# Altium PCB dwatch.PcbDoc
Units mm, origin at the board's own origin, x right, y up, seen from the top; angles counter-clockwise.
Board outline 152.4 x 101.6 mm, 2 copper layers (Top Layer, Bottom Layer); 64 components, 42 nets, 249 pads, 69 vias.
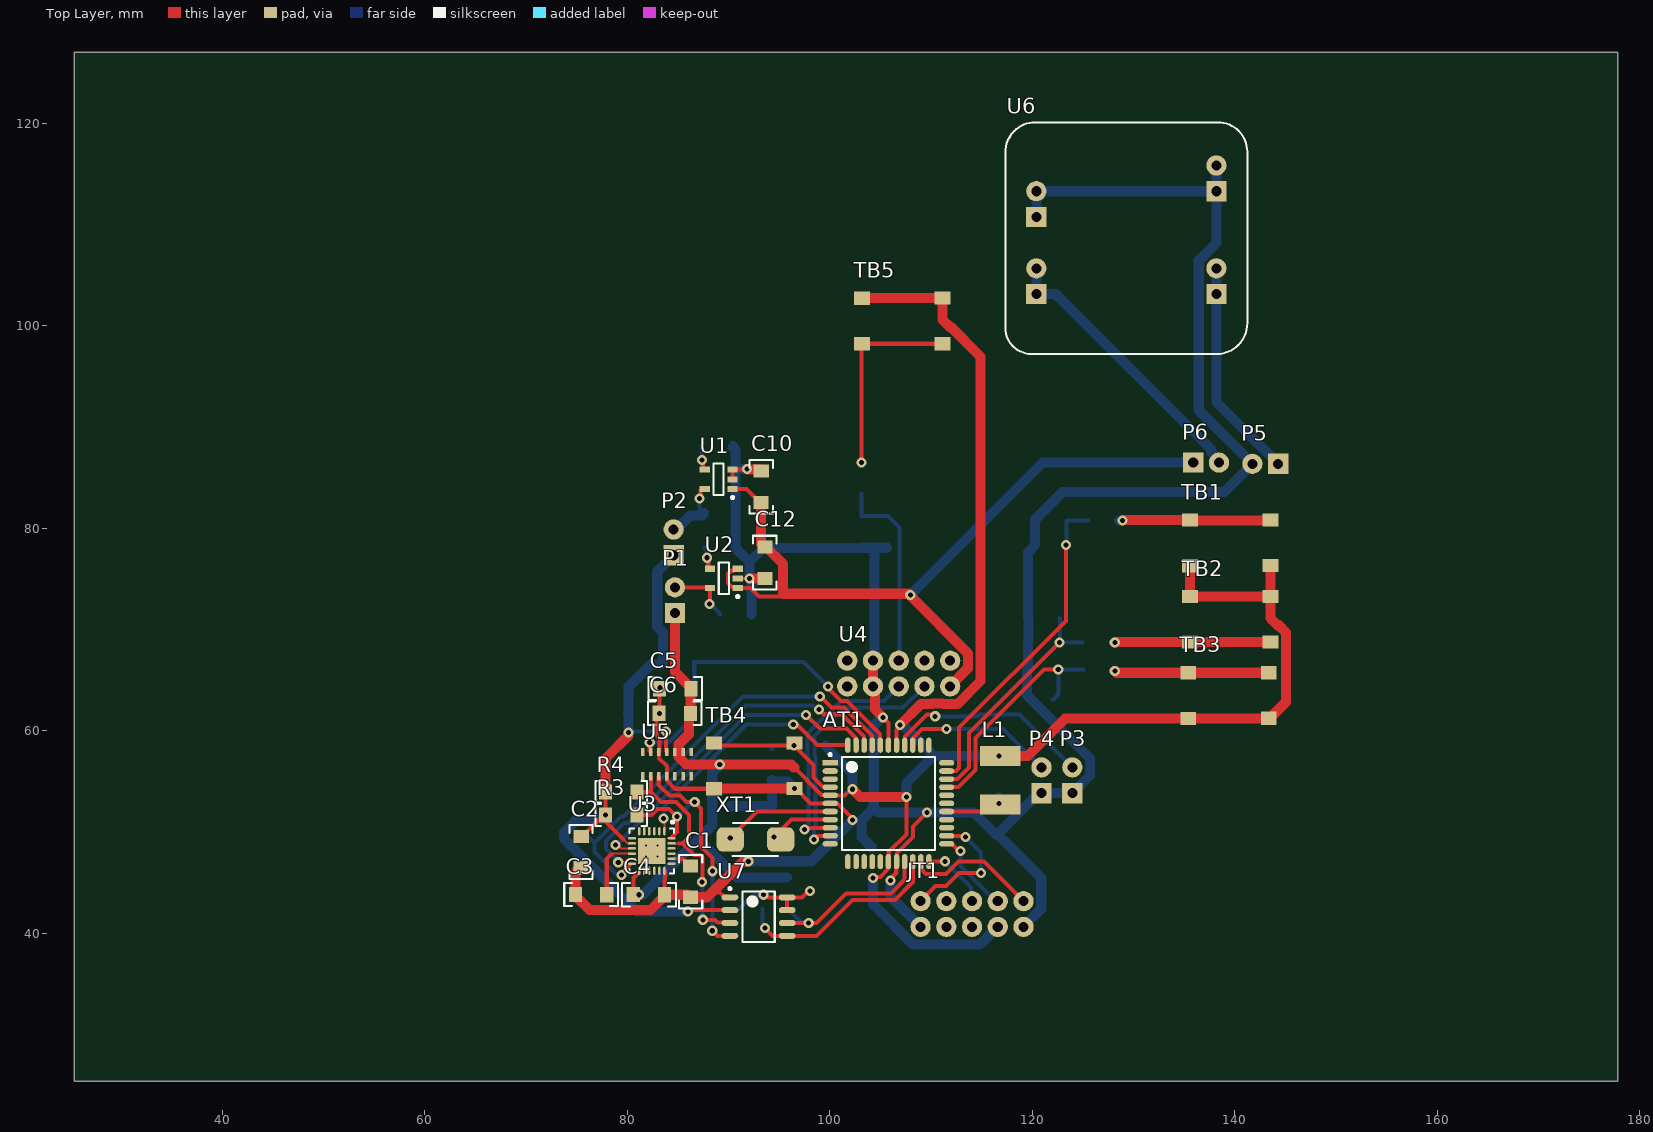
[diagram p0: Top Layer view]
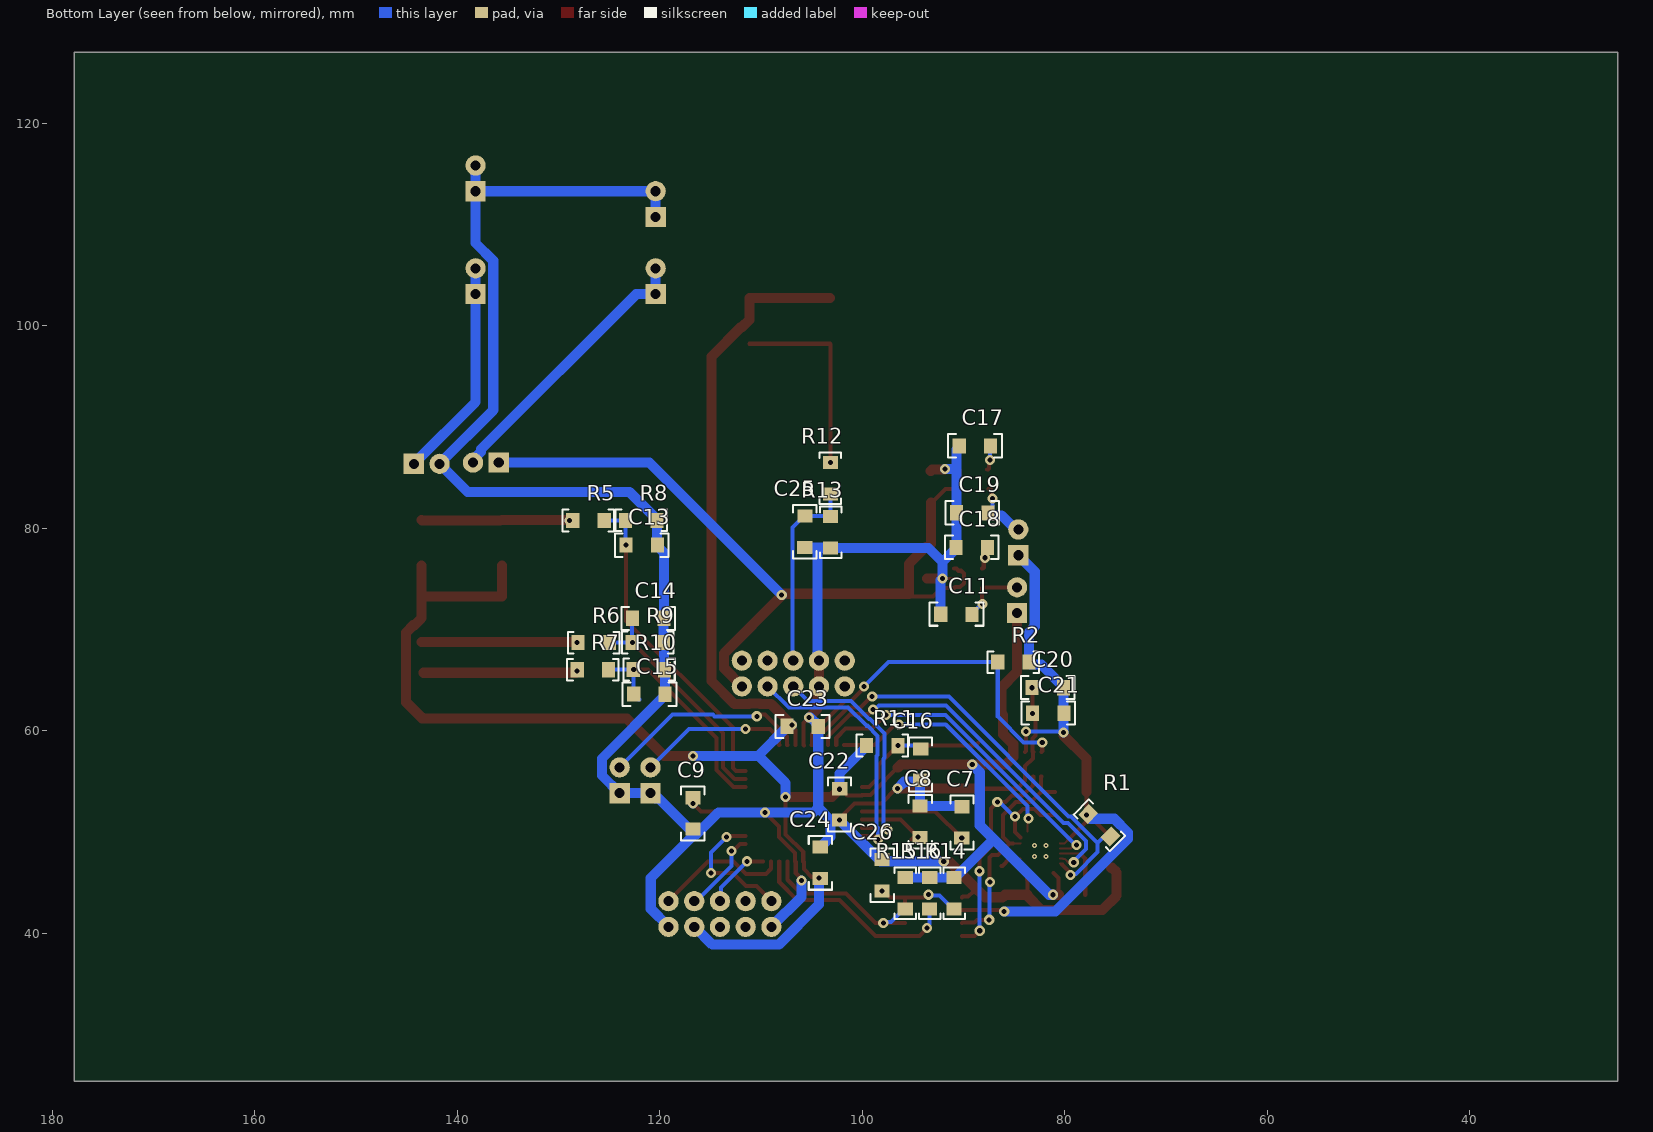
[diagram p1: Bottom Layer view, seen from below]

## Layer stack, top to bottom
Top Solder: solder mask 0.0102, Solder Resist, Dk 3.5
Top Layer: signal copper 0.0356
Dielectric 1: dielectric 0.32, FR-4, Dk 4.8
Bottom Layer: signal copper 0.0356
Bottom Solder: solder mask 0.0102, Solder Resist, Dk 3.5

## Board outline
25.4,25.4 177.8,25.4 177.8,127 25.4,127

## Design rules (kind name [scope] priority, off if disabled: settings)
Clearance Clearance_1 [All] p1: gap=0.25 ignorepadtopadclearanceinfootprint=FALSE except(0.2: SMDPad-SMDPad)
Clearance [All] p2: gap=0.25 ignorepadtopadclearanceinfootprint=FALSE
PolygonConnect [All] p1: connectstyle=Relief reliefconductorwidth=0.254 reliefentries=4 polygonreliefangle="90 Angle" airgapwidth=0.254
RoutingVias [All] p1: holewidth=0.5 width=1 viastyle="Through Hole" minholewidth=0.5 minwidth=1 maxholewidth=0.5 maxwidth=1
SolderMaskExpansion [All] p1: expansion=0.102 istentingtop=FALSE
Width [All] p1: maxlimit=1 minlimit=0.2 preferedwidth=0.4
30 further rules are at their usual default settings.

## Classes and differential pairs
component class dwatch: C1 C2 C3 C4 C5 C6 C7 C8 C9 C10 C11 C12 C13 C14 C15 C16 C17 C18 C19 C20 C21 C22 C23 C24 C25 C26 JT1 L1 P1 P2 P3 P4 P5 P6 R1 R2 R3 R4 R5 R6 R7 R8 R9 R10 R11 R12 R13 R14 R15 R16 TB1 TB2 TB3 TB4 TB5 U2 U4 U5 U6 XT1

## Components (designator, comment, footprint, x,y, rotation, side; value= is the part's Value field where it differs from the comment)
AT1 "ATmega644PA" TQFP-44 105.791,52.832 r0 top
C1 "1206, capacitor" "1206, capasitor" 86.207,42.986 r270 top value=2.2n
C2 "1206, capacitor" "1206, capasitor" 75.476,50.155 r90 top value=10n
C3 "1206, capacitor" "1206, capasitor" 78.553,43.789 r0 top value=0.1u
C4 "1206, capacitor" "1206, capasitor" 80.02,43.853 r180 top value=0.1u
C5 "1206, capacitor" "1206, capasitor" 86.858,64.12 r0 top value=10u
C6 "1206, capacitor" "1206, capasitor" 86.808,61.696 r0 top value=0.1u
C7 "1206, capacitor" "1206, capasitor" 90.196,48.828 r270 bottom value=10p
C8 "1206, capacitor" "1206, capasitor" 94.324,48.891 r270 bottom value=10p
C9 "1206, capacitor" "1206, capasitor" 116.675,53.965 r90 bottom value=100n
C10 "1206, capacitor" "1206, capasitor" 93.192,81.975 r270 top value=0.1u
C11 "1206, capacitor" "1206, capasitor" 88.579,71.475 r180 bottom value=10u
C12 "1206, capacitor" "1206, capasitor" 93.637,78.73 r90 top value=0.1u
C13 "1206, capacitor" "1206, capasitor" 123.892,78.385 r0 bottom value=1u
C14 "1206, capacitor" "1206, capasitor" 123.257,71.146 r0 bottom value=1u
C15 "1206, capacitor" "1206, capasitor" 123.13,63.653 r0 bottom value=1u
C16 "1206, capacitor" "1206, capasitor" 94.196,58.791 r90 bottom value=100n
C17 "1206, capacitor" "1206, capasitor" 86.751,88.1 r180 bottom value=0.1u
C18 "1206, capacitor" "1206, capasitor" 87.055,78.079 r180 bottom value=0.01u
C19 "1206, capacitor" "1206, capasitor" 87.005,81.496 r180 bottom value=1u
C20 "1206, capacitor" "1206, capasitor" 79.562,64.236 r180 bottom value=4.7u
C21 "1206, capacitor" "1206, capasitor" 79.512,61.707 r180 bottom value=0.1u
C22 "1206, capacitor" "1206, capasitor" 102.197,54.854 r90 bottom value=100n
C23 "1206, capacitor" "1206, capasitor" 108.017,60.478 r0 bottom value=100n
C24 "1206, capacitor" "1206, capasitor" 104.178,44.841 r270 bottom value=100n
C25 "1206, capacitor" "1206, capasitor" 105.626,81.778 r90 bottom value=1u
C26 "1206, capacitor" "1206, capasitor" 98.07,43.621 r270 bottom value=0.1u
JT1 "JTAG Connector" Atmel_JTAG 119.154,43.17 r180 top
L1 "Coil" "1812, coil" 116.84,55.118 r270 top value=10u
P1 "1x2 Pin Header" 1x2HEADER 84.709,71.628 r180 top
P2 "1x2 Pin Header" 1x2HEADER 84.582,77.343 r180 top
P3 "1x2 Pin Header" 1x2HEADER 123.952,53.848 r180 top
P4 "1x2 Pin Header" 1x2HEADER 120.904,53.848 r180 top
P5 "1x2 Pin Header" 1x2HEADER 144.272,86.36 r270 top
P6 "1x2 Pin Header" 1x2HEADER 135.89,86.487 r90 top
R1 "1206, resistor" 1206 75.287,49.387 r225 bottom value=1k
R2 "1206, resistor" 1206 86.9,66.788 r0 bottom value=1k
R3 "1206, resistor" 1206 81.235,51.692 r0 top value=1k
R4 "1206, resistor" 1206 81.235,53.978 r0 top value=1k
R5 "1206, resistor" 1206 128.86,80.769 r0 bottom value=1k
R6 "1206, resistor" 1206 128.352,68.704 r0 bottom value=1k
R7 "1206, resistor" 1206 128.429,66.026 r0 bottom value=1k
R8 "1206, resistor" 1206 119.983,80.786 r180 bottom value=10k
R9 "1206, resistor" 1206 119.348,68.721 r180 bottom value=10k
R10 "1206, resistor" 1206 119.221,66.054 r180 bottom value=10k
R11 "1206, resistor" 1206 96.184,58.55 r180 bottom value=10k
R12 "1206, resistor" 1206 103.138,86.773 r90 bottom value=1k
R13 "1206, resistor" 1206 103.121,77.769 r270 bottom value=10k
R14 "1206, resistor" 1206 90.918,42.132 r270 bottom value=200k
R15 "1206, resistor" 1206 95.744,42.132 r270 bottom value=1k
R16 "1206, resistor" 1206 93.331,42.132 r270 bottom value=1k
TB1 "Tactile Button" "Button smd" 143.51,76.327 r180 top value="Button SMD"
TB2 "Tactile Button" "Button smd" 135.56,73.256 r0 top value="Button SMD"
TB3 "Tactile Button" "Button smd" 143.332,61.237 r180 top value="Button SMD"
TB4 "Tactile Button" "Button smd" 96.52,54.301 r180 top value="Button SMD"
TB5 "Tactile Button" "Button smd" 103.175,102.72 r0 top value="Button SMD"
U1 "TPS793" SOT23-5 89.027,84.836 r180 top
U2 "TPS791" SOT23-5 89.535,75.057 r180 top
U3 "MPU-6050" MPU6050_QNF24 82.423,48.133 r270 top
U4 "uOLED-128-G2" uOLED-128-G2 104.267,66.929 r0 top
U5 "MAX30101" MAX30101EFD 83.909,56.712 r90 top
U6 "TPS61201/2" tps61201_2 138.176,103.124 r180 top
U7 "PCA9306" PCA9306 92.964,41.656 r0 top
XT1 "XTAL TXC 7A" XTAL_SMD_LP 90.15,49.276 r0 top value=0

## Footprints (in the part's own frame and the unit in brackets; to place one, negate y for a bottom-side part, rotate by r counter-clockwise, add the part's x,y. Pads: shape width x height; smd on the part's side, far side on the other; paste and mask are expansions set on the pad)
1x2HEADER [mm] "Pad Diameter 2 mm, Hole  1 mm, Pitch 2.54 mm"
  rect 2x2 hole 1: 1(0,0)
  round 2 hole 1: 2(0,-2.54)
  body extent -1.27,-3.81 1.27,1.27, height 5.94
1206 [mm] "Generic 1206"
  rect 1.3x1.5 smd: 0(-3.384,-0.003) 1(-0.286,-0.014)
  silkscreen extent -4.37,-1.07 0.71,1.07, body extent -3.46,-0.79 -0.26,0.81
"1206, capasitor" [mm] "Generic 1206"
  rect 1.3x1.5 smd: 0(-3.673,0.038) 1(-0.575,0.026)
  silkscreen extent -4.78,-1.1 0.53,1.2, body extent -3.78,-0.79 -0.58,0.81
"1812, coil" [mm]
  rect 2x4 smd: 1(-2.385,0) 2(2.385,0)
  body extent -2.3,-1.6 2.3,1.6, height 2.6
Atmel_JTAG [mm]
  round 2 hole 1: 1(0.028,-0.01) 2(0.028,2.53) 3(2.568,-0.01) 4(2.568,2.53) 5(5.108,-0.01) 6(5.108,2.53) 7(7.648,-0.01) 8(7.648,2.53) 9(10.188,-0.01) 10(10.188,2.53)
  body extent -1.15,-1.36 11.55,3.64, height 8.6
"Button smd" [mm]
  rect 1.55x1.3 smd: 1(0,0) 2(0,-4.5) 3(7.95,0.023) 4(7.95,-4.5)
  body extent -0.55,-5.25 8.45,0.75, height 4.3
MAX30101EFD [mm]
  rect 0.8x0.35 smd: 1(-1.2,2.4) 2(-1.2,1.6) 3(-1.2,0.8) 4(-1.2,0) 5(-1.2,-0.8) 6(-1.2,-1.6) 7(-1.2,-2.4) 8(1.2,-2.4) 9(1.2,-1.6) 10(1.2,-0.8) 11(1.2,0) 12(1.2,0.8) 13(1.2,1.6) 14(1.2,2.4)
  body extent -1.65,-2.8 1.65,2.8, height 1.57
MPU6050_QNF24 [mm] "QFN, 24-Leads, Body 4,00x4,00mm, Pitch 0,50mm, Thermal Pad 2,60x2,70mm, IPC Medium Density"
  oval 0.8x0.25 smd: 1(-1.95,1.25) 2(-1.95,0.75) 3(-1.95,0.25) 4(-1.95,-0.25) 5(-1.95,-0.75) 6(-1.95,-1.25) 13(1.95,-1.25) 14(1.95,-0.75) 15(1.95,-0.25) 16(1.95,0.25) 17(1.95,0.75) 18(1.95,1.25)
  oval 0.25x0.8 smd: 7(-1.25,-1.95) 8(-0.75,-1.95) 9(-0.25,-1.95) 10(0.25,-1.95) 11(0.75,-1.95) 12(1.25,-1.95) 19(1.25,1.95) 20(0.75,1.95) 21(0.25,1.95) 22(-0.25,1.95) 23(-0.75,1.95) 24(-1.25,1.95)
  rect 2.6x2.7 smd: 25(0,0)
  silkscreen extent -2.97,-2.2 2.2,2.2, body extent -2.01,-2.01 2.01,2.01, height 1
PCA9306 [mm] "SOIC, 8-Leads, Body 4,90x3,90mm, Pitch 1,27mm, IPC Medium Density"
  oval 1.65x0.6 smd: 1(-2.825,1.905) 2(-2.825,0.635) 3(-2.825,-0.635) 4(-2.825,-1.905) 5(2.825,-1.905) 6(2.825,-0.635) 7(2.825,0.635) 8(2.825,1.905)
  silkscreen extent -2.95,-2.5 1.6,2.88, body extent -4.35,-2.61 4.05,2.77, height 2.2
SOT23-5 [mm] "SOT23, 5-Leads, Body 2,90x2,80mm, Pitch 0,95mm, IPC Medium Density"
  rect 1x0.6 smd: 1(-1.375,0.95) 2(-1.375,0) 3(-1.375,-0.95) 4(1.375,-0.95) 5(1.375,0.95)
  silkscreen extent -1.5,-1.55 0.5,1.92, body extent -0.88,-1.52 0.87,1.53, height 1.45
tps61201_2 [mm]
  rect 2x2 hole 1: 1(0,0) 2(0,-10.16) 2(17.78,-7.62) 3(17.78,0)
  round 2 hole 1: 1(0,-2.54) 2(0,-12.7) 2(17.78,-10.16) 3(17.78,-2.54)
  silkscreen extent -3.05,-16.95 20.84,5.91, body extent -3.05,-16.96 20.84,5.91, height 6.27
TQFP-44 [mm] "QFP, 44-Leads, Body 10,00x10,00mm, Pitch 0,80mm, IPC Medium Density"
  rect 1.5x0.55 smd: 1(-5.75,4)
  oval 1.5x0.55 smd: 2(-5.75,3.2) 3(-5.75,2.4) 4(-5.75,1.6) 5(-5.75,0.8) 6(-5.75,0) 7(-5.75,-0.8) 8(-5.75,-1.6) 9(-5.75,-2.4) 10(-5.75,-3.2) 11(-5.75,-4) 23(5.75,-4) 24(5.75,-3.2) 25(5.75,-2.4) 26(5.75,-1.6) 27(5.75,-0.8) 28(5.75,0) 29(5.75,0.8) 30(5.75,1.6) 31(5.75,2.4) 32(5.75,3.2) 33(5.75,4)
  oval 0.55x1.5 smd: 12(-4,-5.75) 13(-3.2,-5.75) 14(-2.4,-5.75) 15(-1.6,-5.75) 16(-0.8,-5.75) 17(0,-5.75) 18(0.8,-5.75) 19(1.6,-5.75) 20(2.4,-5.75) 21(3.2,-5.75) 22(4,-5.75) 34(4,5.75) 35(3.2,5.75) 36(2.4,5.75) 37(1.6,5.75) 38(0.8,5.75) 39(0,5.75) 40(-0.8,5.75) 41(-1.6,5.75) 42(-2.4,5.75) 43(-3.2,5.75) 44(-4,5.75)
  silkscreen extent -5.87,-4.6 4.6,4.95, body extent -6,-6 6,6, height 1.1
uOLED-128-G2 [mm]
  round 2 hole 1: 1(7.62,-2.54) 2(7.62,0) 3(5.08,-2.54) 4(5.08,0) 5(2.54,-2.54) 6(2.54,0) 7(0,-2.54) 8(0,0) 9(-2.54,-2.54) 10(-2.54,0)
XTAL_SMD_LP [mm] "Pad 1.7x2.4, Pitch 3.7"
  rrect50% 2.7x2.4 smd: 1(0.02,0) 2(5,0)
  silkscreen extent 0.26,-1.66 4.76,1.62, body extent 0.02,-1.6 5.02,1.6, height 1.35

## Part data
AT1: "ATmega644PA - Small but big and PicoPower", Farnell=2484915
JT1: library part "Atmel JTAG", "Atmel JTAG Connector"
P1 P2 P3 P4 P5 P6: "2.54 mm, TH"
R1 R2 R3 R4 R5 R6 R7 R8 R9 R10 R11 R12 R13 R14 R15 R16: "Resistor"
TB1 TB2 TB3 TB4 TB5: library part "Button SMD", "Tactile Switch Small Low", ELFA=110-87-406
XT1: "16 MHz, SMD, 5mm x 3,2mm, 30 ppm", Farnell=1841946
U1: Digikey=TPS79333
U2: Digikey=TPS79118
U3: Digikey=1428-1007-1-ND
U4: Farnell=UOLED-128-G2
U5: Digikey=MAX30101EFD+T
U7: Digikey=568-4215-1-ND

## Via types
v1: diameter 1, hole 0.5, Top Layer to Bottom Layer, 65 vias
v2: diameter 0.5, hole 0.2, Top Layer to Bottom Layer, 4 vias

## Nets (pads, with @x,y where several pads share a name; then routed paths per layer and width w, separated by ;. In a path a pad name is that pad's centre, name@x,y a point inside that pad or via, vN(x,y) a via of type N, cw(c..) or ccw(c..) an arc to the next point about the centre after c; other vN are vias at no path point)
3V3: AT1.5 AT1.17 AT1.38 C4.1 C5.1 C6.1 C22.1 C23.1 C24.1 JT1.4 L1.1 P1.1 R11.0 R14.0 R15.0 R16.0 TB1.1 TB1.3 TB2.1 TB2.3 TB3.1 TB3.3 TB5.1 TB5.3 U3.13 U5.9 U5.10 | length 233.7
  Top Layer w0.4: C4.1 80.595,45.48 U3.13@81.098,45.983 ; 96.493,56.361 96.522,56.361 97.745,55.137 97.745,55.108 99.193,53.661 100.012,53.661 AT1.5 101.476,53.632 102.073,54.229 v1(102.235,54.229) ; v1(104.267,45.466) 104.382,45.581 104.99,45.581 105.762,46.353 105.762,47.053 AT1.17 ; AT1.17@105.82,47.111 105.82,48.035 107.569,49.784 v1(107.569,53.467) ; AT1.38 106.591,60.074 106.934,60.417 v1(106.934,60.579) ; v1(116.713,57.531) 116.812,57.63 L1.1@116.84,57.63
  Top Layer w1: C4.1 80.606,43.815 v1(81.153,43.815) ; P1.1 84.709,65.82 86.283,64.246 C5.1 86.258,64.121 86.258,61.747 C6.1 86.083,61.572 86.083,59.667 85.09,58.674 85.09,57.912 85.09,57.424 85.852,56.662 v1(89.134,56.662) 96.191,56.662 96.493,56.361 ; v1(102.235,54.229) 102.997,53.467 v1(107.569,53.467) ; TB5.1 103.186,102.732 111.114,102.732 TB5.3 111.125,100.593 111.831,99.887 111.944,99.887 114.887,96.944 114.887,64.914 112.612,62.639 111.162,62.639 111.116,62.685 110.118,62.685 110.072,62.639 108.994,62.639 v1(106.934,60.579) ; JT1.4@116.55,40.64 JT1.4 ; v1(116.713,57.531) 119.572,57.531 123.255,61.214 TB3.3 ; TB3.3@135.393,61.225 143.321,61.225 TB3.1 143.457,61.237 145.035,62.815 145.035,69.717 144.329,70.423 144.216,70.423 143.51,71.129 TB2.3 ; TB2.1 TB1.3 ; TB2.1@135.571,73.268 143.499,73.268 TB2.3 ; TB1.1 TB2.3
  Bottom Layer w1: v1(81.153,43.815) 81.534,43.815 87.058,49.34 ; v1(89.134,56.662) 88.392,55.92 88.392,50.673 87.058,49.34 ; R15.0 R16.0 R14.0 90.821,45.516 87.058,49.278 87.058,49.34 ; R11.0 99.568,58.447 102.235,55.78 v1(102.235,54.229) ; C24.1 104.251,45.416 104.267,45.4 v1(104.267,45.466) 104.267,42.864 108.241,38.89 114.8,38.89 116.55,40.64 JT1.4 ; v1(106.934,60.579) 107.315,60.579 C23.1 107.442,60.352 110.236,57.558 110.236,57.531 ; v1(107.569,53.467) 107.569,54.864 110.236,57.531 ; v1(116.713,57.531) 110.236,57.531
5V: C10.1 C12.1 P6.1 U1.1 U2.1 U2.3 U4.1 | length 79.5
  Top Layer w0.4: U1.1@90.302,83.986 U1.1 91.782,83.886 93.118,82.55 C10.1 ; U2.3 90.71,76.007 90.51,75.807 90.224,75.807 89.96,75.543 89.96,74.571 90.324,74.207 90.81,74.207 U2.1 92.181,74.107 93.009,73.279 95.123,73.279 95.377,73.533
  Top Layer w1: C10.1 93.218,78.447 93.51,78.155 C12.1 93.71,78.155 95.377,76.488 95.377,73.533 v1@107.758,73.533 ; v1@107.917,73.373 113.637,67.654 113.637,66.175 111.887,64.425 U4.1
  Bottom Layer w1: v1(107.95,73.406) 121.031,86.487 P6.1
\R\E\S\E\T\: AT1.4 C16.1 R11.1 TB4.2 TB4.4 | length 16.4
  Top Layer w0.4: TB4.4 88.835,58.536 v1(96.47,58.536) 98.395,56.611 98.395,55.378 99.312,54.461 100.012,54.461 AT1.4
  Bottom Layer w0.4: C16.1 94.543,58.536 v1(96.47,58.536)
AD0: AT1.43 U3.9 | length 32.5
  Top Layer w0.2: v1(78.83,48.731) 79.047,48.731 79.395,48.383 U3.9
  Top Layer w0.4: v1(97.663,61.572) 99.023,60.212 101.661,60.212 102.562,59.311 102.562,58.611 AT1.43
  Bottom Layer w0.4: v1(78.83,48.731) 78.941,48.731 91.781,61.572 v1(97.663,61.572)
CLKIN: AT1.44 U3.1 | length 24.9
  Top Layer w0.2: v1(83.593,51.335) 83.663,51.264 83.663,50.093 U3.1
  Top Layer w0.4: v1(96.393,60.622) 96.411,60.64 96.742,60.64 98.8,58.582 AT1.44
  Bottom Layer w0.4: v1(83.593,51.335) 83.693,51.435 83.693,52.565 91.75,60.622 v1(96.393,60.622)
FSYNC: AT1.42 U3.11 | length 37.3
  Top Layer w0.2: v1(79.114,47.017) 79.141,46.99 79.633,46.99 80.001,47.358 80.159,47.358 80.184,47.383 U3.11
  Top Layer w0.4: v1(98.933,62.103) 99.397,61.639 101.154,61.639 103.362,59.43 103.362,58.611 AT1.42
  Bottom Layer w0.4: v1(79.114,47.017) 79.114,47.104 77.88,48.338 77.88,49.125 79.667,50.912 80.122,50.912 91.732,62.522 98.352,62.522 98.771,62.103 v1(98.933,62.103)
GND: AT1.6 AT1.18 AT1.39 C1.1 C2.0 C3.0 C4.0 C5.0 C6.0 C7.0 C8.0 C9.0 C10.0 C11.0 C12.0 C13.0 C14.0 C15.0 C16.0 C17.0 C18.0 C19.0 C20.0 C21.0 C22.0 C23.0 C24.0 C25.0 C26.0 JT1.2 JT1.10 P3.1 P4.1 P5.2 R8.1 R9.1 R10.1 R13.1 TB4.1 TB4.3 U1.2 U1.3 U2.2 U3.18 U4.7 U4.8 U5.4 U5.12 U6.2 U7.1 | length 307.5
  Top Layer w0.3: U2.2 v1(92.075,75.057)
  Top Layer w0.4: v1(83.235,64.251) 83.185,64.201 v1(83.185,61.722) 82.87,61.407 82.87,59.55 83.17,59.25 83.17,57.973 U5.12 83.134,57.887 83.134,57.287 83.909,56.512 U5.4 83.934,55.487 83.934,55.076 84.731,54.278 TB4.3 ; C4.0 83.693,45.247 83.748,45.302 U3.18@83.748,46.183 ; 89.027,44.704 89.027,44.148 89.549,43.626 90.074,43.626 U7.1 ; U1.2@90.502,84.936 U1.2 U1.3 90.435,85.819 91.788,85.819 v1(91.821,85.852) ; TB4.1@96.645,54.301 98.114,52.832 AT1.6 100.07,52.803 100.77,52.803 102.235,51.338 v1(102.235,51.181) ; v1(105.249,61.307) 105.791,60.765 AT1.39 AT1.39@105.762,58.553 ; v1(105.984,45.231) 105.984,45.394 106.562,45.972 106.562,47.053 106.62,47.111 106.62,47.915 108.219,49.515 108.219,50.561 v1(109.601,51.943) v1@109.661,52.003
  Top Layer w1: C2.0 75.338,46.482 74.88,46.024 C3.0 74.88,43.726 76.291,42.315 82.293,42.315 83.693,43.715 C4.0 85.879,43.815 86.133,43.561 87.884,43.561 89.027,44.704 91.44,47.117 v1(91.948,47.117) ; TB4.3 88.593,54.301 v1(96.52,54.301) ; v1(91.821,85.852) 91.875,85.798 93.079,85.798 C10.0 ; v1(92.075,75.057) C12.0 ; U4.8 U4.7 104.458,64.198 104.458,62.097 v1(105.249,61.307)
  Bottom Layer w0.4: C21.0@83.135,61.799 C21.0@83.185,61.849
  Bottom Layer w1: C7.0 90.222,52.564 C8.0 94.35,52.628 94.292,52.686 C16.0@94.292,55.06 ; C17.0 90.424,88.038 90.678,87.784 90.678,85.852 ; v1(91.821,85.852) 90.678,85.852 ; v1(91.948,47.117) 98.171,47.117 v1(102.235,51.181) ; C11.0 92.252,74.88 v1(92.075,75.057) 92.075,76.669 ; C16.0 C16.0@94.292,55.06 ; v1(96.52,54.301) 95.853,54.968 94.384,54.968 C16.0@94.292,55.06 ; C24.0 104.04,48.514 103.89,48.664 103.89,48.764 103.124,49.53 103.124,51.181 104.344,52.401 ; U4.8 104.399,67.061 104.399,78.08 ; v1(105.249,61.307) 105.11,61.307 104.344,60.541 C23.0 104.344,52.401 ; C25.0 105.639,78.08 104.399,78.08 ; v1(105.984,45.231) 105.984,43.622 JT1.10 ; JT1.2 119.126,40.676 120.876,42.426 120.876,45.467 C9.0@116.559,49.784 ; U6.2@120.396,110.744 120.396,113.284 U6.2@138.176,113.284 ; U6.2@138.176,115.824 U6.2@138.176,113.284 ; 90.678,85.852 C19.0 90.703,81.509 90.703,78.141 C18.0 90.728,78.016 92.075,76.669 ; 92.075,76.669 93.462,78.055 R13.1 103.16,78.08 104.399,78.08 ; 104.344,52.401 104.803,51.943 v1(109.601,51.943) 114.2,51.943 116.359,49.784 C9.0@116.559,49.784 ; C9.0@116.559,49.784 120.123,53.348 120.404,53.348 P4.1 P3.1 125.702,55.598 125.702,57.271 119.482,63.491 119.482,66.015 R10.1 119.57,66.103 119.57,68.693 119.609,68.732 119.609,71.084 C14.0 119.584,77.613 120.219,78.248 C13.0 120.244,78.373 120.244,80.847 122.992,83.595 138.967,83.595 P5.2 136.426,91.666 136.426,106.424 138.176,108.174 U6.2@138.176,113.284
INTMAX: AT1.40 R2.1 U5.13 | length 34.3
  Top Layer w0.4: v1(82.22,58.857) 82.22,58.001 U5.13 ; v1(99.822,64.389) 99.822,64.243 101.126,62.939 101.692,62.939 104.962,59.669 104.962,58.611 AT1.40
  Bottom Layer w0.4: v1(82.22,58.857) 84.076,58.857 86.614,61.394 R2.1 97.409,66.802 v1(99.822,64.389)
INTMPU: AT1.41 R1.1 U3.12 | length 43.7
  Top Layer w0.2: U3.12@80.184,46.883 U3.12
  Top Layer w0.4: v1(79.443,45.768) 79.558,45.883 79.558,46.093 U3.12@80.273,46.808 ; v1(99.014,63.373) 99.095,63.373 100.179,62.289 101.423,62.289 104.162,59.549 104.162,58.611 AT1.41
  Bottom Layer w0.4: R1.1 76.132,49.58 76.774,48.938 ; v1(79.443,45.768) 79.329,45.883 78.904,45.883 76.774,48.014 76.774,48.938 ; v1(99.014,63.373) 91.44,63.373 79.629,51.562 79.398,51.562 76.774,48.938
IO1: C25.1 R12.0 R13.0 U4.6 | length 19.6
  Bottom Layer w0.4: R12.0 103.124,83.378 R13.0 103.174,81.203 C25.1 105.753,81.203 106.864,80.092 106.864,66.986 U4.6
NetAT1_7: AT1.7 C7.1 XT1.1 | length 11.1
  Top Layer w0.4: XT1.1 v1(90.17,49.403) 92.799,52.032 AT1.7
NetAT1_8: AT1.8 C8.1 XT1.2 | length 7.3
  Top Layer w0.4: XT1.2 94.896,49.53 v1(94.488,49.53) 96.2,51.242 98.109,51.242 98.119,51.232 AT1.8
  Bottom Layer w0.4: C8.1 94.424,49.466 v1(94.488,49.53)
NetAT1_27: AT1.27 C9.1 L1.2 | length 6.1
  Top Layer w0.4: AT1.27 115.913,52.032 v1(116.713,52.832)
  Bottom Layer w1: C9.1 116.713,53.379 v1(116.713,52.832)
NetAT1_36: AT1.36 P4.2 | length 16.2
  Top Layer w0.4: AT1.36 108.22,58.611 108.22,59.311 109.107,60.198 v1(111.506,60.198) ; P4.2 P4.2@120.904,57.202
  Bottom Layer w0.4: v1(111.506,60.198) 117.094,60.198 P4.2
NetAT1_37: AT1.37 P3.2 | length 20.6
  Top Layer w0.4: AT1.37 107.42,58.611 107.42,59.43 109.584,61.595 110.248,61.595 v1(110.408,61.435)
  Bottom Layer w0.4: v1(110.408,61.435) 114.577,61.435 114.738,61.595 118.745,61.595 P3.2
NetC1_0: C1.0 U3.20 | length 2.2
  Top Layer w0.2: U3.20 85.078,47.383 85.09,47.371
  Top Layer w0.4: 85.09,47.371 85.432,47.371 86.144,46.659 C1.0
NetC3_1: C3.1 U3.10 | length 6.3
  Top Layer w0.2: 78.412,47.805 78.474,47.867 79.168,47.867 79.184,47.883 U3.10
  Top Layer w0.4: C3.1 77.978,47.371 78.412,47.805
NetC11_1: C11.1 P1.2 U2.5 | length 6.6
  Top Layer w0.4: P1.2 84.74,74.137 88.13,74.137 U2.5 88.149,74.096 88.149,72.528 v1(88.138,72.517)
  Bottom Layer w0.4: v1(88.138,72.517) 88.238,72.517 89.154,71.601 C11.1
NetC17_1: C17.1 U1.4 | length 2.5
  Top Layer w0.4: v1(87.376,86.741) 87.491,86.626 87.491,85.886 87.591,85.786 U1.4
  Bottom Layer w0.4: C17.1 87.376,88.077 v1(87.376,86.741)
NetC18_1: C18.1 U2.4 | length 2.4
  Top Layer w0.4: v1(87.884,77.089) 87.999,76.974 87.999,76.107 88.099,76.007 U2.4
  Bottom Layer w0.4: C18.1 87.884,77.851 v1(87.884,77.089)
NetC19_1: C19.1 P2.2 U1.5 | length 6.6
  Top Layer w0.4: v1@87.069,82.984 v1(87.122,82.931) 87.237,83.046 87.237,83.786 87.337,83.886 U1.5@87.525,83.886
  Bottom Layer w0.4: v1(87.122,82.931) 87.13,82.923 87.13,81.973 C19.1
  Bottom Layer w1: P2.2 84.853,79.883 86.243,81.273 87.43,81.273 87.58,81.423 C19.1
NetC26_1: C26.1 R14.1 U7.7 U7.8 | length 9.3
  Top Layer w0.4: v1(93.472,43.818) 93.634,43.818 93.891,43.561 U7.8 ; U7.7 U7.8 ; v1(98.044,44.196) 97.882,44.196 97.247,43.561 U7.8
  Bottom Layer w0.4: R14.1 91.032,42.418 92.372,43.758 93.412,43.758 v1(93.472,43.818)
NetP5_1: P5.1 U6.1 | length 21.8
  Bottom Layer w1: U6.1@138.176,105.664 138.176,103.124 138.176,92.456 P5.1
NetP6_2: P6.2 U6.3 | length 27.8
  Bottom Layer w1: U6.3@120.396,105.664 120.396,103.124 122.314,103.124 137.64,87.798 137.64,87.548 138.43,86.758 P6.2
NetR5_1: R5.1 TB1.2 TB1.4 | length 14.8
  Top Layer w1: v1(128.905,80.772) 128.96,80.827 TB1.4 ; TB1.4@135.763,80.772 143.455,80.772 TB1.2
  Bottom Layer w1: R5.1 128.585,80.772 v1(128.905,80.772)
NetR6_1: R6.1 TB2.2 TB2.4 | length 15.4
  Top Layer w1: v1(128.143,68.707) 128.192,68.756 TB2.2 TB2.4
NetR7_1: R7.1 TB3.2 TB3.4 | length 15.3
  Top Layer w1: v1(128.143,65.913) 128.319,65.737 TB3.4 TB3.2
NetR12_1: R12.1 TB5.2 TB5.4 | length 19.7
  Top Layer w0.4: v1(103.124,86.487) 103.124,98.169 TB5.2 TB5.4
PA5: AT1.32 C13.1 R5.0 R8.0 | length 32.3
  Top Layer w0.4: AT1.32 112.462,56.032 112.776,56.346 112.776,60.325 123.317,70.866 v1(123.317,78.359)
  Bottom Layer w0.4: v1(123.317,78.359) 123.367,78.409 R8.0 125.465,80.783 R5.0
PA6: AT1.31 C14.1 R6.0 R9.0 | length 23.4
  Top Layer w0.4: AT1.31 111.547,55.239 112.587,55.239 113.74,56.391 113.74,59.765 v1(122.682,68.707)
  Bottom Layer w0.4: C14.1 122.732,71.07 R9.0 124.957,68.718 R6.0
PA7: AT1.30 C15.1 R7.0 R10.0 | length 23.4
  Top Layer w0.4: AT1.30 112.7,54.432 114.39,56.122 114.39,59.272 121.158,66.04 v1(122.555,66.04)
  Bottom Layer w0.4: C15.1@122.005,63.077 122.105,63.077 122.555,63.527 C15.1 122.605,63.677 R10.0@122.605,66.04 ; R10.0 125.023,66.051 R7.0
RX: AT1.9 U4.5 | length 23.3
  Top Layer w0.4: v1(97.49,50.246) 97.647,50.403 100.012,50.403 AT1.9
  Bottom Layer w0.4: v1(97.49,50.246) 97.49,50.353 97.917,50.78 97.917,57.242 97.818,57.341 97.818,59.753 99.218,61.153 99.327,61.153 101.113,62.939 105.357,62.939 U4.5
SCL: R4.1 U3.23 U5.2 U7.3 | length 23.4
  Top Layer w0.2: U3.23 84.383,48.893 85.09,48.893
  Top Layer w0.4: R4.1 82.307,53.964 82.334,53.937 ; U5.2 82.334,55.487 82.334,53.937 ; 85.09,48.893 85.473,48.893 ; v1(87.376,45.085) 87.444,45.153 87.444,47.495 87.18,47.759 86.607,47.759 85.473,48.893 ; v1(87.461,41.341) 88.654,41.341 88.935,41.059 90.101,41.059 U7.3 ; 82.334,53.937 83.312,52.959 84.836,52.959 86.106,51.689 86.106,49.525 85.473,48.893
  Bottom Layer w0.4: v1(87.376,45.085) 87.418,45.043 87.418,41.383 v1(87.461,41.341)
SCL3V3: AT1.19 R15.1 U7.6 | length 17.9
  Top Layer w0.4: U7.6 v1(97.917,41.021) 98.679,41.021 101.615,43.957 106.053,43.957 107.391,45.295 AT1.19
  Bottom Layer w0.4: R15.1 95.858,42.418 97.14,41.136 97.802,41.136 v1(97.917,41.021)
SDA: R3.1 U3.24 U5.3 U7.4 | length 29.8
  Top Layer w0.4: R3.1 82.389,51.678 82.996,52.285 84.13,52.285 84.89,51.525 v1(84.926,51.525) 84.926,50.011 U3.24@84.373,49.458 ; U5.3 83.109,54.654 84.154,53.609 85.202,53.609 85.852,52.959 v1(86.659,52.959) 87.302,52.316 87.302,48.556 88.43,47.428 v1(88.43,46.139) ; v1(88.392,40.259) 88.395,40.259 88.903,39.751 U7.4
  Bottom Layer w0.4: v1(84.926,51.525) 85.016,51.525 86.45,52.959 v1(86.659,52.959) v1@86.659,52.797 ; v1(88.392,40.259) 88.411,40.278 88.411,46.12 v1(88.43,46.139)
SDA3V3: AT1.20 R16.1 U7.5 | length 21.1
  Top Layer w0.4: v1(93.599,40.513) 93.602,40.513 94.364,39.751 U7.5 98.679,39.751 102.235,43.307 106.426,43.307 108.191,45.072 AT1.20
  Bottom Layer w0.4: R16.1 93.345,40.929 93.599,40.675 v1(93.599,40.513)
TCK: AT1.21 JT1.1 | length 13.2
  Top Layer w0.4: AT1.21 108.991,46.382 109.491,45.882 111.488,45.882 112.688,47.082 115.224,47.082 JT1.1
TDI: AT1.24 JT1.9 | length 13.2
  Top Layer w0.4: JT1.9 110.459,44.673 111.475,44.673 112.776,45.974 v1(114.935,45.974) ; AT1.24 111.57,49.603 113.338,49.603 v1(113.411,49.53)
  Bottom Layer w0.4: v1(113.411,49.53) 114.935,48.006 v1(114.935,45.974)
TDO: AT1.23 JT1.3 | length 8.2
  Top Layer w0.4: AT1.23 112.057,48.832 112.756,48.133 v1(112.903,48.133)
  Bottom Layer w0.4: v1(112.903,48.133) 112.903,46.662 116.385,43.18 JT1.3
TMS: AT1.22 JT1.5 | length 6.6
  Top Layer w0.4: AT1.22 109.808,47.099 111.361,47.099 v1(111.379,47.117)
  Bottom Layer w0.4: v1(111.379,47.117) 113.95,44.546 113.95,43.276 JT1.5
TX: AT1.10 U4.3 | length 25
  Top Layer w0.4: v1(98.425,49.276) 98.781,49.632 AT1.10
  Bottom Layer w0.4: v1(98.425,49.276) 98.44,49.291 98.44,50.383 98.567,50.511 98.567,57.512 98.468,57.611 98.468,59.483 99.488,60.503 99.596,60.503 101.382,62.289 107.247,62.289 U4.3
"VLOGIC 1.8": C2.1 C20.1 C21.1 P2.1 R1.0 R2.0 R3.0 R4.0 U3.8 U5.11 U7.2 | length 67.6
  Top Layer w0.2: 79.629,49.276 80.012,48.893 80.463,48.893 U3.8
  Top Layer w0.4: C2.1 75.549,49.58 77.658,51.689 v1(77.851,51.689) ; R4.0 v1(77.851,51.689) ; 79.629,49.276 77.851,51.054 v1(77.851,51.689) ; v1(83.82,59.944) 83.82,58.001 U5.11 ; v1(85.979,42.161) 86.141,42.161 86.271,42.291 U7.2
  Top Layer w1: R4.0 77.851,57.277 80.137,59.563 v1(80.137,59.817)
  Bottom Layer w0.4: C21.1@80.087,61.633 C21.1 ; v1(80.137,59.817) 80.252,59.932 80.659,59.932 80.671,59.944 v1(83.82,59.944)
  Bottom Layer w1: v1(77.851,51.689) 77.482,51.32 75.118,51.32 73.759,49.961 73.759,49.34 80.938,42.161 v1(85.979,42.161) ; C21.1@80.087,61.633 80.137,61.583 v1(80.137,59.817) ; C21.1 80.112,61.758 80.112,64.237 C20.1 80.137,64.362 82.316,66.541 83.366,66.541 83.516,66.691 R2.0 83.516,69.76 82.959,70.317 82.959,75.72 P2.1
pads on no net: AT1.1 AT1.2 AT1.3 AT1.11 AT1.12 AT1.13 AT1.14 AT1.15 AT1.16 AT1.25 AT1.26 AT1.28 AT1.29 AT1.33 AT1.34 AT1.35 JT1.6 JT1.7 JT1.8 U3.2 U3.3 U3.4 U3.5 U3.6 U3.7 U3.14 U3.15 U3.16 U3.17 U3.19 U3.21 U3.22 U3.25 U4.2 U4.4 U4.9 U4.10 U5.1 U5.5 U5.6 U5.7 U5.8 U5.14
copper on no net:
  other v2: 81.873,47.583 82.973,47.583 81.873,48.683 82.973,48.683

## Silkscreen, mask and mechanical layers (free items; w line width, h text height)
Mechanical 15:
  lines w0.254: 98.679,96.865 98.679,62.865 132.679,62.865 132.679,96.81 132.588,96.901 98.679,96.901